# Altium PCB POWER_SUPPLY.PcbDoc (part 4 of 5)
Units mm, origin at the board's own origin, x right, y up, seen from the top; angles counter-clockwise.
Board outline 115 x 115 mm, 2 copper layers (Top Layer, Bottom Layer), stack 1.58 mm thick; 91 components, 48 nets, 207 pads, 26 vias.
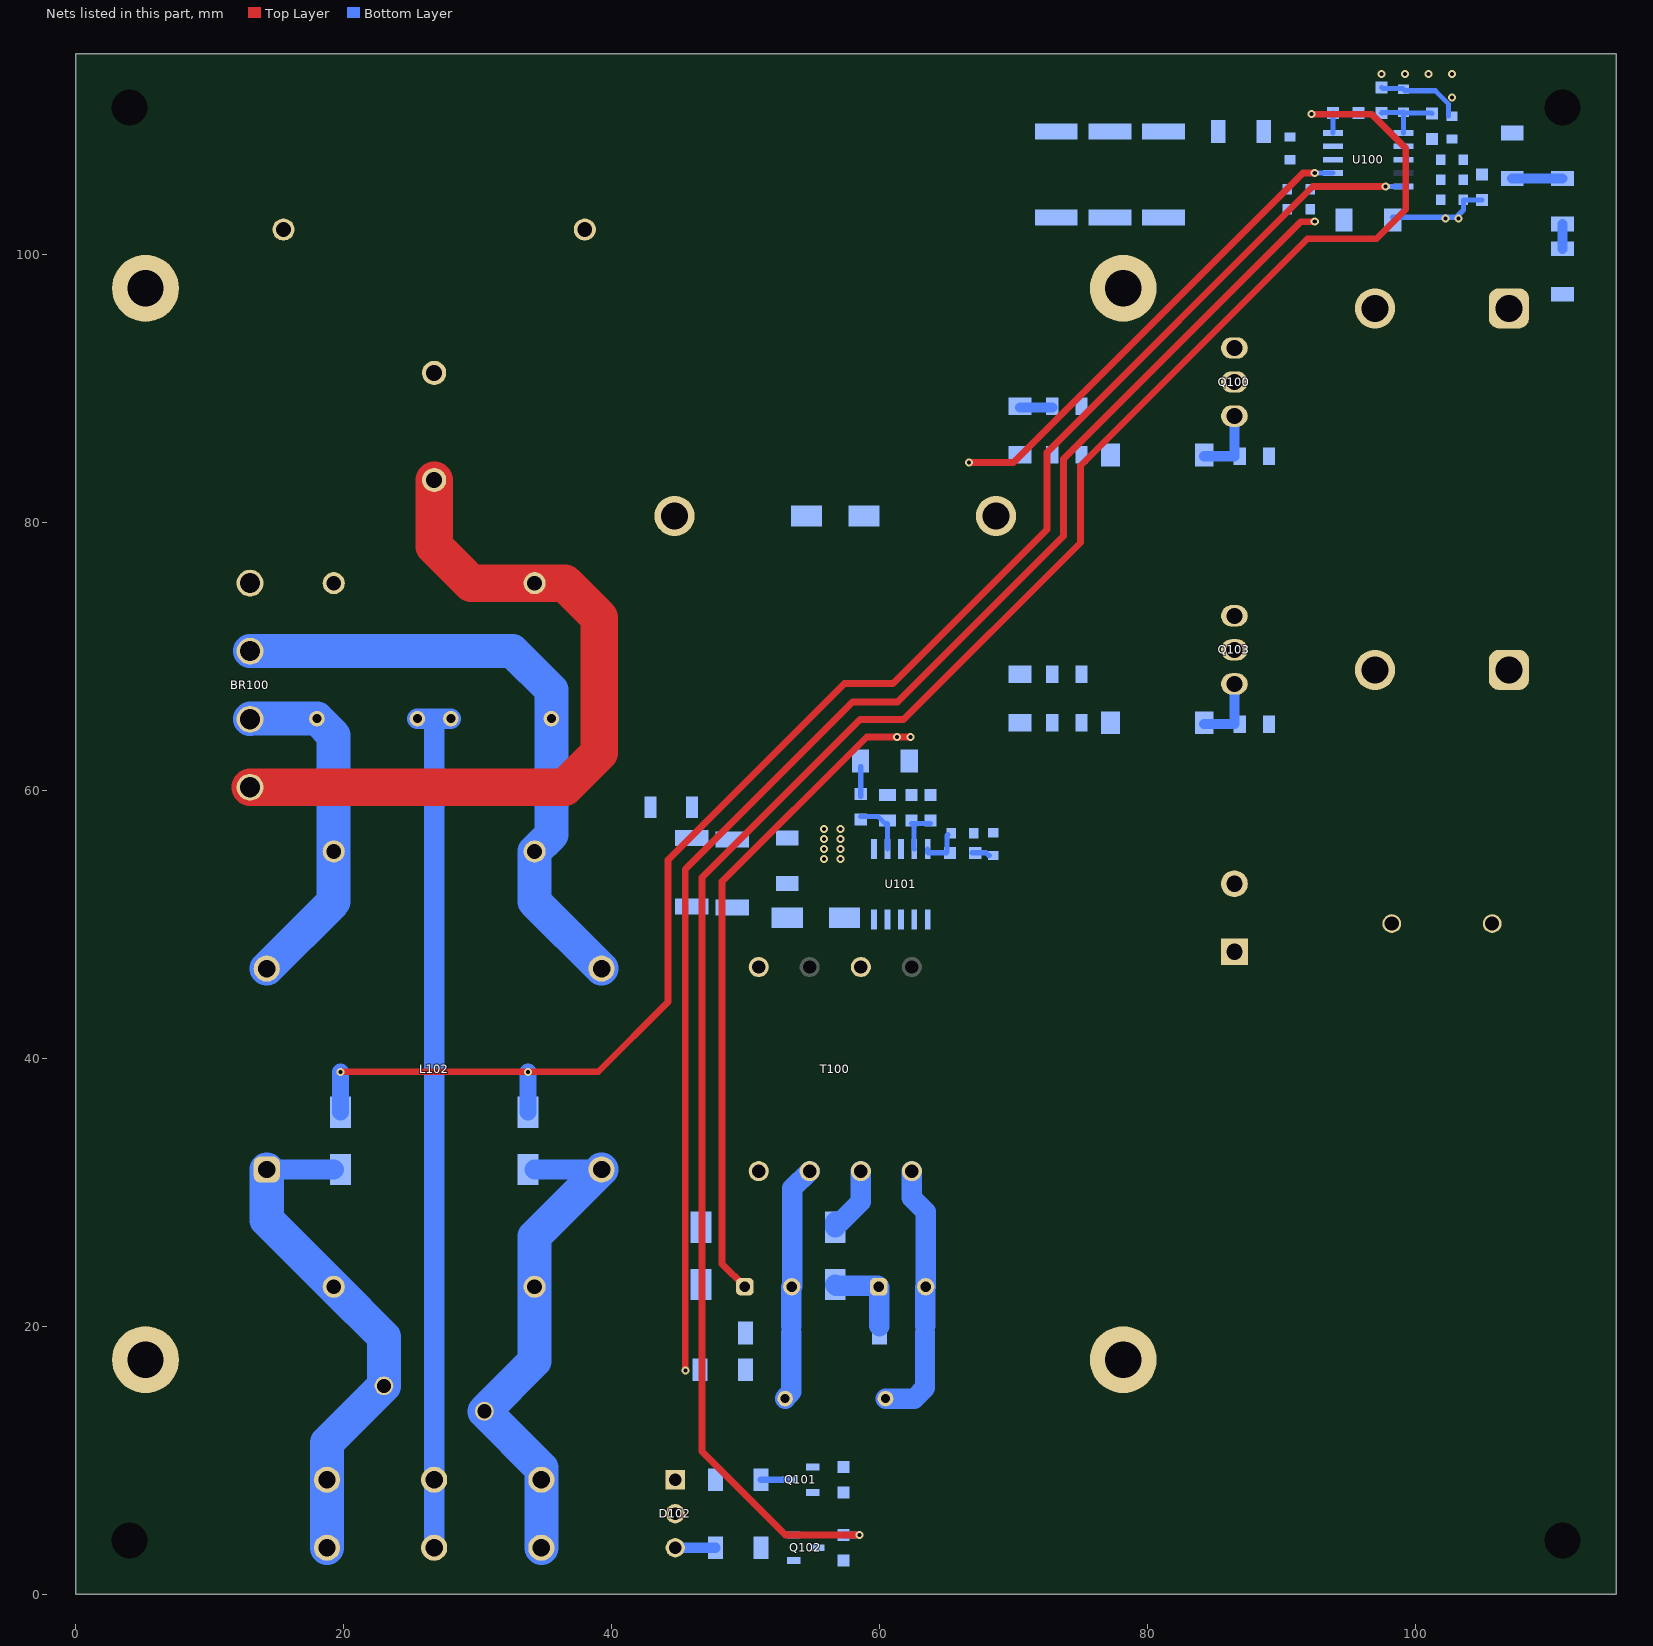
[diagram p2: the nets of this part, all layers, seen from the top]

## Part data (continued)
R121 R122: library part RC2010FK-07150KL, "RES 150K OHM 1% 3/4W 2010", Case Code (Imperial)=2010, Case Code (Metric)=5025, Manufacturer="Yageo Group", Max Operating Temperature=155°C, Max Power Dissipation=750mW, Min Operating Temperature=-55°C, Supplier Part Number=13-RC2010FK-07150KLDKR-ND, Temperature Coefficient=100ppm/°C, Tolerance=1%, Voltage Rating=400V, Working Voltage=200V, Case/Package=2010, Category="Chip SMD Resistors", China RoHS=Non-Compliant, ComponentLink1Description=https://datasheet.octopart.com:443/RC2010FK-07150KL-Yageo-datasheet-175887523.pdf?src-supplier=Newark, ComponentLink1URL=https://datasheet.octopart.com:443/RC2010FK-07150KL-Yageo-datasheet-175887523.pdf?src-supplier=Newark, ComponentLink2Description=https://datasheet.octopart.com:443/RC2010FK-07150KL-Yageo-datasheet-103092701.pdf?src-supplier=Upverter, ComponentLink2URL=https://datasheet.octopart.com:443/RC2010FK-07150KL-Yageo-datasheet-103092701.pdf?src-supplier=Upverter, ComponentLink3Description=https://datasheet.octopart.com:443/RC2010FK-07150KL-Yageo-datasheet-176638170.pdf?src-supplier=Future+Electronics, ComponentLink3URL=https://datasheet.octopart.com:443/RC2010FK-07150KL-Yageo-datasheet-176638170.pdf?src-supplier=Future+Electronics, ComponentLink4Description=https://datasheet.octopart.com:443/RC2010FK-07150KL-Yageo-datasheet-164759695.pdf?src-supplier=Future+Electronics, ComponentLink4URL=https://datasheet.octopart.com:443/RC2010FK-07150KL-Yageo-datasheet-164759695.pdf?src-supplier=Future+Electronics, ComponentLink5Description=https://datasheet.octopart.com:443/RC2010FK-07150KL-Yageo-datasheet-137700087.pdf?src-supplier=Future+Electronics, ComponentLink5URL=https://datasheet.octopart.com:443/RC2010FK-07150KL-Yageo-datasheet-137700087.pdf?src-supplier=Future+Electronics, ComponentLink6Description=https://datasheet.octopart.com/RC2010FK-07150KL-Yageo-datasheet-73766026.pdf, ComponentLink6URL=https://datasheet.octopart.com/RC2010FK-07150KL-Yageo-datasheet-73766026.pdf, ComponentLink7Description=http://sigma.octopart.com:80/conflict_mineral_statement/Yageo-company-3.pdf?src-supplier=Compliance+Statements, ComponentLink7URL=http://sigma.octopart.com:80/conflict_mineral_statement/Yageo-company-3.pdf?src-supplier=Compliance+Statements, ComponentLink8Description=http://sigma.octopart.com:80/rohs_statement/Yageo-company-2.pdf?src-supplier=Compliance+Statements, ComponentLink8URL=http://sigma.octopart.com:80/rohs_statement/Yageo-company-2.pdf?src-supplier=Compliance+Statements, Composition="Thick Film", Country of Origin="Mainland China, Taiwan", Export Control Classification Number (ECCN) Code=EAR99, Features="Moisture Resistant", Harmonized Tariff Schedule (HTS) Code=8533.21.00.30, Height=550µm, Introduction Date=2004-10-04, Length=5mm, Lifecycle Status=Production, Manufacturer Part Number=RC2010FK-07150KL, Mounting Technology="Surface Mount", Number of Terminals=2, Number of Terminations=2, Power Rating=750mW, Pricing="1=0.23, 10=0.117, 25=0.0932, 50=0.0796, 100=0.0689, 250=0.05808, 500=0.05186, 1000=0.04694 (USD)", REACH SVHC=Yes, RoHS=Compliant, Stock=15946, Supplier=DigiKey, Termination=SMD/SMT, Width=2.5mm
R123: library part RC1206FR-07511RL, "RES 511 OHM 1% 1/4W 1206", Case Code (Imperial)=1206, Case Code (Metric)=3216, Manufacturer="Yageo Group", Max Operating Temperature=155°C, Max Power Dissipation=250mW, Min Operating Temperature=-55°C, Supplier Part Number=311-511FRCT-ND, Temperature Coefficient=100ppm/°C, Tolerance=1%, Voltage Rating=200V, Case/Package=1206, Category="Chip SMD Resistors", China RoHS=Non-Compliant, ComponentLink1Description=https://datasheet.octopart.com:443/RC1206FR-07511RL-Yageo-datasheet-175887523.pdf?src-supplier=Newark, ComponentLink1URL=https://datasheet.octopart.com:443/RC1206FR-07511RL-Yageo-datasheet-175887523.pdf?src-supplier=Newark, ComponentLink2Description=https://datasheet.octopart.com:443/RC1206FR-07511RL-Yageo-datasheet-103092701.pdf?src-supplier=Upverter, ComponentLink2URL=https://datasheet.octopart.com:443/RC1206FR-07511RL-Yageo-datasheet-103092701.pdf?src-supplier=Upverter, ComponentLink3Description=https://datasheet.octopart.com:443/RC1206FR-07511RL-Yageo-Group-datasheet-190305687.pdf?src-supplier=Future+Electronics, ComponentLink3URL=https://datasheet.octopart.com:443/RC1206FR-07511RL-Yageo-Group-datasheet-190305687.pdf?src-supplier=Future+Electronics, ComponentLink4Description=https://datasheet.octopart.com:443/RC1206FR-07511RL-Yageo-datasheet-164759695.pdf?src-supplier=Future+Electronics, ComponentLink4URL=https://datasheet.octopart.com:443/RC1206FR-07511RL-Yageo-datasheet-164759695.pdf?src-supplier=Future+Electronics, ComponentLink5Description=https://datasheet.octopart.com:443/RC1206FR-07511RL-Yageo-datasheet-127823281.pdf?src-supplier=Future+Electronics, ComponentLink5URL=https://datasheet.octopart.com:443/RC1206FR-07511RL-Yageo-datasheet-127823281.pdf?src-supplier=Future+Electronics, ComponentLink6Description=https://datasheet.octopart.com:443/RC1206FR-07511RL-Yageo-datasheet-137700087.pdf?src-supplier=Future+Electronics, ComponentLink6URL=https://datasheet.octopart.com:443/RC1206FR-07511RL-Yageo-datasheet-137700087.pdf?src-supplier=Future+Electronics, ComponentLink7Description=https://datasheet.octopart.com:443/RC1206FR-07511RL-Yageo-datasheet-27233761.pdf?src-supplier=Future+Electronics, ComponentLink7URL=https://datasheet.octopart.com:443/RC1206FR-07511RL-Yageo-datasheet-27233761.pdf?src-supplier=Future+Electronics, ComponentLink8Description=https://datasheet.octopart.com:443/RC1206FR-07511RL-Yageo-datasheet-13032847.pdf?src-supplier=Future+Electronics, ComponentLink8URL=https://datasheet.octopart.com:443/RC1206FR-07511RL-Yageo-datasheet-13032847.pdf?src-supplier=Future+Electronics, ComponentLink9Description=https://datasheet.octopart.com:443/RC1206FR-07511RL-Yageo-datasheet-8359522.pdf?src-supplier=Future+Electronics, ComponentLink9URL=https://datasheet.octopart.com:443/RC1206FR-07511RL-Yageo-datasheet-8359522.pdf?src-supplier=Future+Electronics, ComponentLink10Description=https://datasheet.octopart.com:443/RC1206FR-07511RL-Yageo-Group-datasheet-189192902.pdf?src-supplier=TME, ComponentLink10URL=https://datasheet.octopart.com:443/RC1206FR-07511RL-Yageo-Group-datasheet-189192902.pdf?src-supplier=TME, ComponentLink11Description=https://datasheet.octopart.com:443/RC1206FR-07511RL-Yageo-Group-datasheet-176638170.pdf?src-supplier=TME, ComponentLink11URL=https://datasheet.octopart.com:443/RC1206FR-07511RL-Yageo-Group-datasheet-176638170.pdf?src-supplier=TME, ComponentLink12Description=https://datasheet.octopart.com/RC1206FR-07511RL-Yageo-datasheet-73766026.pdf, ComponentLink12URL=https://datasheet.octopart.com/RC1206FR-07511RL-Yageo-datasheet-73766026.pdf, ComponentLink13Description=https://datasheet.octopart.com:443/RC1206FR-07511RL-Yageo-datasheet-118639.pdf?src-supplier=DigiKey, ComponentLink13URL=https://datasheet.octopart.com:443/RC1206FR-07511RL-Yageo-datasheet-118639.pdf?src-supplier=DigiKey, ComponentLink14Description=http://sigma.octopart.com:80/conflict_mineral_statement/Yageo-company-3.pdf?src-supplier=Compliance+Statements, ComponentLink14URL=http://sigma.octopart.com:80/conflict_mineral_statement/Yageo-company-3.pdf?src-supplier=Compliance+Statements, ComponentLink15Description=http://sigma.octopart.com:80/rohs_statement/Yageo-company-2.pdf?src-supplier=Compliance+Statements, ComponentLink15URL=http://sigma.octopart.com:80/rohs_statement/Yageo-company-2.pdf?src-supplier=Compliance+Statements, Composition="Thick Film", Country of Origin="Mainland China, Taiwan", Depth=1.6mm, Export Control Classification Number (ECCN) Code=EAR99, Features="Moisture Resistant", Harmonized Tariff Schedule (HTS) Code=8533.21.00.30, Height=550µm, Introduction Date=2004-09-22, Lead Free="Lead Free", Length=3.1mm, Lifecycle Status=Production, Manufacturer Part Number=RC1206FR-07511RL, Military Standard=Not, Mounting Technology="Surface Mount", Number of Terminals=2, Number of Terminations=2, Packaging="Tape & Reel", Power Rating=250mW, Pricing="1=0.1, 10=0.047, 25=0.036, 50=0.0296, 100=0.0247, 250=0.0198, 500=0.01698, 1000=0.01477 (USD)", REACH SVHC=Yes, RoHS=Compliant, Schedule B="8533210045, 8533210045|8533210045|8533210045|8533210045|8533210045", Stock=3972, Supplier=DigiKey, Termination=SMD/SMT, Voltage Rating (DC)=200V, Width=1.6mm, Working Voltage=200V
R124: library part RC1206FR-0747RL, "RES 47R OHM 1% 1/4W 1206", Case Code (Imperial)=1206, Case Code (Metric)=3216, Manufacturer="Yageo Group", Max Operating Temperature=155°C, Min Operating Temperature=-55°C, Power Rating=250mW, Supplier Part Number=311-47.0FRDKR-ND, Temperature Coefficient=100ppm/°C, Tolerance=1%, Voltage Rating=200V, Case/Package=1206, Category="Chip SMD Resistors", China RoHS=Non-Compliant, ComponentLink1Description=https://datasheet.octopart.com:443/RC1206FR-0747RL-Yageo-datasheet-175887523.pdf?src-supplier=IHS, ComponentLink1URL=https://datasheet.octopart.com:443/RC1206FR-0747RL-Yageo-datasheet-175887523.pdf?src-supplier=IHS, ComponentLink2Description=https://datasheet.octopart.com:443/RC1206FR-0747RL-Yageo-datasheet-103092701.pdf?src-supplier=Upverter, ComponentLink2URL=https://datasheet.octopart.com:443/RC1206FR-0747RL-Yageo-datasheet-103092701.pdf?src-supplier=Upverter, ComponentLink3Description=https://datasheet.octopart.com:443/RC1206FR-0747RL-Yageo-datasheet-8359522.pdf?src-supplier=element14+APAC, ComponentLink3URL=https://datasheet.octopart.com:443/RC1206FR-0747RL-Yageo-datasheet-8359522.pdf?src-supplier=element14+APAC, ComponentLink4Description=https://datasheet.octopart.com:443/RC1206FR-0747RL-Yageo-Group-datasheet-190305687.pdf?src-supplier=Future+Electronics, ComponentLink4URL=https://datasheet.octopart.com:443/RC1206FR-0747RL-Yageo-Group-datasheet-190305687.pdf?src-supplier=Future+Electronics, ComponentLink5Description=https://datasheet.octopart.com:443/RC1206FR-0747RL-Yageo-datasheet-164759695.pdf?src-supplier=Future+Electronics, ComponentLink5URL=https://datasheet.octopart.com:443/RC1206FR-0747RL-Yageo-datasheet-164759695.pdf?src-supplier=Future+Electronics, ComponentLink6Description=https://datasheet.octopart.com:443/RC1206FR-0747RL-Yageo-datasheet-137700087.pdf?src-supplier=Future+Electronics, ComponentLink6URL=https://datasheet.octopart.com:443/RC1206FR-0747RL-Yageo-datasheet-137700087.pdf?src-supplier=Future+Electronics, ComponentLink7Description=https://datasheet.octopart.com:443/RC1206FR-0747RL-Yageo-datasheet-27233761.pdf?src-supplier=Future+Electronics, ComponentLink7URL=https://datasheet.octopart.com:443/RC1206FR-0747RL-Yageo-datasheet-27233761.pdf?src-supplier=Future+Electronics, ComponentLink8Description=https://datasheet.octopart.com:443/RC1206FR-0747RL-Yageo-datasheet-13032847.pdf?src-supplier=Future+Electronics, ComponentLink8URL=https://datasheet.octopart.com:443/RC1206FR-0747RL-Yageo-datasheet-13032847.pdf?src-supplier=Future+Electronics, ComponentLink9Description=https://datasheet.octopart.com:443/RC1206FR-0747RL-Yageo-datasheet-62067350.pdf?src-supplier=Farnell, ComponentLink9URL=https://datasheet.octopart.com:443/RC1206FR-0747RL-Yageo-datasheet-62067350.pdf?src-supplier=Farnell, ComponentLink10Description=https://datasheet.octopart.com:443/RC1206FR-0747RL-Yageo-datasheet-13691069.pdf?src-supplier=Farnell, ComponentLink10URL=https://datasheet.octopart.com:443/RC1206FR-0747RL-Yageo-datasheet-13691069.pdf?src-supplier=Farnell, ComponentLink11Description=https://datasheet.octopart.com:443/RC1206FR-0747RL-Yageo-datasheet-148775077.pdf?src-supplier=JRH+Electronics, ComponentLink11URL=https://datasheet.octopart.com:443/RC1206FR-0747RL-Yageo-datasheet-148775077.pdf?src-supplier=JRH+Electronics, ComponentLink12Description=https://datasheet.octopart.com/RC1206FR-0747RL-Yageo-datasheet-73766026.pdf, ComponentLink12URL=https://datasheet.octopart.com/RC1206FR-0747RL-Yageo-datasheet-73766026.pdf, ComponentLink13Description=https://datasheet.octopart.com:443/RC1206FR-0747RL-Yageo-datasheet-118639.pdf?src-supplier=DigiKey, ComponentLink13URL=https://datasheet.octopart.com:443/RC1206FR-0747RL-Yageo-datasheet-118639.pdf?src-supplier=DigiKey, ComponentLink14Description=http://sigma.octopart.com:80/conflict_mineral_statement/Yageo-company-3.pdf?src-supplier=Compliance+Statements, ComponentLink14URL=http://sigma.octopart.com:80/conflict_mineral_statement/Yageo-company-3.pdf?src-supplier=Compliance+Statements, ComponentLink15Description=http://sigma.octopart.com:80/rohs_statement/Yageo-company-2.pdf?src-supplier=Compliance+Statements, ComponentLink15URL=http://sigma.octopart.com:80/rohs_statement/Yageo-company-2.pdf?src-supplier=Compliance+Statements, Composition="Thick Film", Country of Origin="Mainland China, Taiwan", Depth=1.6mm, Export Control Classification Number (ECCN) Code=EAR99, Harmonized Tariff Schedule (HTS) Code=8533.21.00.30, Height=550µm, Introduction Date=2004-09-22, Lead Free="Lead Free", Length=3.1mm, Lifecycle Status=Production, Manufacturer Part Number=RC1206FR-0747RL, Military Standard=Not, Mounting Technology="Surface Mount", Number of Terminals=2, Number of Terminations=2, Packaging="Tape & Reel", Pins=2, Pricing="1=0.1, 10=0.047, 25=0.036, 50=0.0296, 100=0.0247, 250=0.0198, 500=0.01698, 1000=0.01477 (USD)", REACH SVHC=Yes, RoHS=Compliant, Schedule B="8533210045, 8533210045|8533210045, 8533210045|8533210045|8533210045, 8533210045|8533210045|8533210045|8533210045", Stock=63732, Supplier=DigiKey, Termination=SMD/SMT, Voltage Rating (AC)=200V, Voltage Rating (DC)=200V, Weight=16.187578mg, Width=1.6mm, Working Voltage=200V
R125: library part RC1206FR-070RL, "RES 0 OHM JUMPER 1/4W 1206", Case Code (Imperial)=1206, Case Code (Metric)=3216, Manufacturer="Yageo Group", Max Operating Temperature=155°C, Max Power Dissipation=250mW, Min Operating Temperature=-55°C, Supplier Part Number=YAG3367CT-ND, Tolerance=1%, Voltage Rating=200V, Case/Package=1206, Category="Chip SMD Resistors", China RoHS=Non-Compliant, ComponentLink1Description=https://datasheet.octopart.com:443/RC1206FR-070RL-Yageo-datasheet-141265859.pdf?src-supplier=Upverter, ComponentLink1URL=https://datasheet.octopart.com:443/RC1206FR-070RL-Yageo-datasheet-141265859.pdf?src-supplier=Upverter, ComponentLink2Description=https://datasheet.octopart.com:443/RC1206FR-070RL-Yageo-datasheet-8359522.pdf?src-supplier=IHS, ComponentLink2URL=https://datasheet.octopart.com:443/RC1206FR-070RL-Yageo-datasheet-8359522.pdf?src-supplier=IHS, ComponentLink3Description=https://datasheet.octopart.com:443/RC1206FR-070RL-Yageo-Group-datasheet-176638170.pdf?src-supplier=Future+Electronics, ComponentLink3URL=https://datasheet.octopart.com:443/RC1206FR-070RL-Yageo-Group-datasheet-176638170.pdf?src-supplier=Future+Electronics, ComponentLink4Description=https://datasheet.octopart.com:443/RC1206FR-070RL-Yageo-datasheet-164759695.pdf?src-supplier=Future+Electronics, ComponentLink4URL=https://datasheet.octopart.com:443/RC1206FR-070RL-Yageo-datasheet-164759695.pdf?src-supplier=Future+Electronics, ComponentLink5Description=https://datasheet.octopart.com:443/RC1206FR-070RL-Yageo-datasheet-137700087.pdf?src-supplier=Future+Electronics, ComponentLink5URL=https://datasheet.octopart.com:443/RC1206FR-070RL-Yageo-datasheet-137700087.pdf?src-supplier=Future+Electronics, ComponentLink6Description=https://datasheet.octopart.com:443/RC1206FR-070RL-Yageo-datasheet-27233761.pdf?src-supplier=Future+Electronics, ComponentLink6URL=https://datasheet.octopart.com:443/RC1206FR-070RL-Yageo-datasheet-27233761.pdf?src-supplier=Future+Electronics, ComponentLink7Description=https://datasheet.octopart.com:443/RC1206FR-070RL-Yageo-datasheet-13032847.pdf?src-supplier=Future+Electronics, ComponentLink7URL=https://datasheet.octopart.com:443/RC1206FR-070RL-Yageo-datasheet-13032847.pdf?src-supplier=Future+Electronics, ComponentLink8Description=https://datasheet.octopart.com/RC1206FR-070RL-Yageo-datasheet-73766026.pdf, ComponentLink8URL=https://datasheet.octopart.com/RC1206FR-070RL-Yageo-datasheet-73766026.pdf, ComponentLink9Description=http://sigma.octopart.com:80/conflict_mineral_statement/Yageo-company-3.pdf?src-supplier=Compliance+Statements, ComponentLink9URL=http://sigma.octopart.com:80/conflict_mineral_statement/Yageo-company-3.pdf?src-supplier=Compliance+Statements, ComponentLink10Description=http://sigma.octopart.com:80/rohs_statement/Yageo-company-2.pdf?src-supplier=Compliance+Statements, ComponentLink10URL=http://sigma.octopart.com:80/rohs_statement/Yageo-company-2.pdf?src-supplier=Compliance+Statements, Composition="Thick Film", Contact Plating=Tin, Country of Origin="Mainland China, Taiwan", Export Control Classification Number (ECCN) Code=EAR99, Features="Moisture Resistant", Harmonized Tariff Schedule (HTS) Code=8533.21.00.30, Height=550µm, Introduction Date=2009-07-17, Lead Free="Lead Free", Length=3.1mm, Lifecycle Status=Production, Manufacturer Part Number=RC1206FR-070RL, Mounting Technology="Surface Mount", Number of Terminals=2, Number of Terminations=2, Packaging="Tape & Reel", Power Rating=250mW, Pricing="1=0.1, 10=0.028, 25=0.0232, 50=0.0204, 100=0.0178, 250=0.01508, 500=0.01334, 1000=0.01187 (USD)", Radiation Hardening=No, REACH SVHC=Yes, RoHS=Compliant, Stock=769584, Supplier=DigiKey, Width=1.6mm
R126: library part RC1206FR-071K5L, "RES 1.5K OHM 1% 1/4W 1206", Case Code (Imperial)=1206, Case Code (Metric)=3216, Manufacturer="Yageo Group", Max Operating Temperature=155°C, Max Power Dissipation=250mW, Min Operating Temperature=-55°C, Supplier Part Number=311-1.50KFRCT-ND, Temperature Coefficient=100ppm/°C, Tolerance=1%, Voltage Rating=200V, Case/Package=1206, Category="Chip SMD Resistors", China RoHS=Non-Compliant, ComponentLink1Description=https://datasheet.octopart.com:443/RC1206FR-071K5L-Yageo-datasheet-175887523.pdf?src-supplier=Newark, ComponentLink1URL=https://datasheet.octopart.com:443/RC1206FR-071K5L-Yageo-datasheet-175887523.pdf?src-supplier=Newark, ComponentLink2Description=https://datasheet.octopart.com:443/RC1206FR-071K5L-Yageo-datasheet-103092701.pdf?src-supplier=Upverter, ComponentLink2URL=https://datasheet.octopart.com:443/RC1206FR-071K5L-Yageo-datasheet-103092701.pdf?src-supplier=Upverter, ComponentLink3Description=https://datasheet.octopart.com:443/RC1206FR-071K5L-Yageo-datasheet-8359522.pdf?src-supplier=element14+APAC, ComponentLink3URL=https://datasheet.octopart.com:443/RC1206FR-071K5L-Yageo-datasheet-8359522.pdf?src-supplier=element14+APAC, ComponentLink4Description=https://datasheet.octopart.com:443/RC1206FR-071K5L-Yageo-Group-datasheet-190305687.pdf?src-supplier=Future+Electronics, ComponentLink4URL=https://datasheet.octopart.com:443/RC1206FR-071K5L-Yageo-Group-datasheet-190305687.pdf?src-supplier=Future+Electronics, ComponentLink5Description=https://datasheet.octopart.com:443/RC1206FR-071K5L-Yageo-datasheet-164759695.pdf?src-supplier=Future+Electronics, ComponentLink5URL=https://datasheet.octopart.com:443/RC1206FR-071K5L-Yageo-datasheet-164759695.pdf?src-supplier=Future+Electronics, ComponentLink6Description=https://datasheet.octopart.com:443/RC1206FR-071K5L-Yageo-datasheet-137700087.pdf?src-supplier=Future+Electronics, ComponentLink6URL=https://datasheet.octopart.com:443/RC1206FR-071K5L-Yageo-datasheet-137700087.pdf?src-supplier=Future+Electronics, ComponentLink7Description=https://datasheet.octopart.com:443/RC1206FR-071K5L-Yageo-datasheet-27233761.pdf?src-supplier=Future+Electronics, ComponentLink7URL=https://datasheet.octopart.com:443/RC1206FR-071K5L-Yageo-datasheet-27233761.pdf?src-supplier=Future+Electronics, ComponentLink8Description=https://datasheet.octopart.com:443/RC1206FR-071K5L-Yageo-datasheet-13032847.pdf?src-supplier=Future+Electronics, ComponentLink8URL=https://datasheet.octopart.com:443/RC1206FR-071K5L-Yageo-datasheet-13032847.pdf?src-supplier=Future+Electronics, ComponentLink9Description=https://datasheet.octopart.com:443/RC1206FR-071K5L-Yageo-datasheet-8324387.pdf?src-supplier=Future+Electronics, ComponentLink9URL=https://datasheet.octopart.com:443/RC1206FR-071K5L-Yageo-datasheet-8324387.pdf?src-supplier=Future+Electronics, ComponentLink10Description=https://datasheet.octopart.com:443/RC1206FR-071K5L-Yageo-datasheet-62067350.pdf?src-supplier=Farnell, ComponentLink10URL=https://datasheet.octopart.com:443/RC1206FR-071K5L-Yageo-datasheet-62067350.pdf?src-supplier=Farnell, ComponentLink11Description=https://datasheet.octopart.com:443/RC1206FR-071K5L-Yageo-datasheet-176638170.pdf?src-supplier=Farnell, ComponentLink11URL=https://datasheet.octopart.com:443/RC1206FR-071K5L-Yageo-datasheet-176638170.pdf?src-supplier=Farnell, ComponentLink12Description=https://datasheet.octopart.com:443/RC1206FR-071K5L-Yageo-datasheet-79472498.pdf?src-supplier=Megastar, ComponentLink12URL=https://datasheet.octopart.com:443/RC1206FR-071K5L-Yageo-datasheet-79472498.pdf?src-supplier=Megastar, ComponentLink13Description=https://datasheet.octopart.com/RC1206FR-071K5L-Yageo-datasheet-73766026.pdf, ComponentLink13URL=https://datasheet.octopart.com/RC1206FR-071K5L-Yageo-datasheet-73766026.pdf, ComponentLink14Description=https://datasheet.octopart.com:443/RC1206FR-071K5L-Yageo-datasheet-118639.pdf?src-supplier=DigiKey, ComponentLink14URL=https://datasheet.octopart.com:443/RC1206FR-071K5L-Yageo-datasheet-118639.pdf?src-supplier=DigiKey, ComponentLink15Description=http://sigma.octopart.com:80/conflict_mineral_statement/Yageo-company-3.pdf?src-supplier=Compliance+Statements, ComponentLink15URL=http://sigma.octopart.com:80/conflict_mineral_statement/Yageo-company-3.pdf?src-supplier=Compliance+Statements, ComponentLink16Description=http://sigma.octopart.com:80/rohs_statement/Yageo-company-2.pdf?src-supplier=Compliance+Statements, ComponentLink16URL=http://sigma.octopart.com:80/rohs_statement/Yageo-company-2.pdf?src-supplier=Compliance+Statements, Composition="Thick Film", Depth=1.6mm, Features="Moisture Resistant", Height=550µm, Lead Free="Lead Free", Length=3.1mm, Lifecycle Status=Production, Manufacturer Part Number=RC1206FR-071K5L, Military Standard=Not, Mounting Technology="Surface Mount", Number of Terminals=2, Number of Terminations=2, Packaging="Tape & Reel", Pins=2, Power Rating=250mW, Pricing="1=0.1, 10=0.047, 25=0.036, 50=0.0296, 100=0.0247, 250=0.0198, 500=0.01698, 1000=0.01477 (USD)", REACH SVHC=Yes, RoHS=Compliant, Schedule B="8533210045, 8533210045|8533210045, 8533210045|8533210045|8533210045, 8533210045|8533210045|8533210045|8533210045", Stock=90251, Supplier=DigiKey, Termination=SMD/SMT, Voltage Rating (AC)=200V, Voltage Rating (DC)=200V, Width=1.6mm, Working Voltage=200V
R127: library part RC0603FR-0710RL, "RES 10 OHM 1% 1/10W 0603", Case Code (Imperial)=0603, Case Code (Metric)=1608, Manufacturer="Yageo Group", Max Operating Temperature=155°C, Max Power Dissipation=100mW, Min Operating Temperature=-55°C, Supplier Part Number=311-10.0HRCT-ND, Temperature Coefficient=±200ppm/°C, Tolerance=1%, Voltage Rating=75V, Voltage Rating (AC)=50V, Case/Package=0603, Category="Chip SMD Resistors", China RoHS=Non-Compliant, Component Link Description=https://www.yageogroup.com/content/datasheet/asset/file/PYU-RC_GROUP_51_ROHS_L, Component Link URL=https://www.yageogroup.com/content/datasheet/asset/file/PYU-RC_GROUP_51_ROHS_L, Composition="Thick Film", Contact Plating=Tin, Datasheet=https://www.yageogroup.com/content/datasheet/asset/file/PYU-RC_GROUP_51_ROHS_L, Depth=800µm, Features="Moisture Resistant", Height=450µm, Lead Free="Lead Free", Length=1.6mm, Lifecycle Status=Production, Manufacturer Part Number=RC0603FR-0710RL, Military Standard=Not, Mounting Technology="Surface Mount", Number of Terminals=2, Number of Terminations=2, Packaging="Tape & Reel", Power Dissipation=100mW, Power Rating=100mW, Radiation Hardening=No, REACH SVHC=Yes, RoHS=Compliant, Supplier=DigiKey, Termination=SMD/SMT, Voltage Rating (DC)=50V, Weight=2.012816mg, Width=800µm, Working Voltage=75V
R128: library part RC0603FR-07301KL, "RES 301K OHM 1% 1/10W 0603", Case Code (Imperial)=0603, Case Code (Metric)=1608, Manufacturer="Yageo Group", Max Operating Temperature=155°C, Max Power Dissipation=100mW, Min Operating Temperature=-55°C, Supplier Part Number=311-301KHRCT-ND, Temperature Coefficient=±200ppm/°C, Tolerance=1%, Voltage Rating=75V, Voltage Rating (AC)=50V, Case/Package=0603, Category="Chip SMD Resistors", China RoHS=Non-Compliant, Component Link Description=https://www.yageogroup.com/content/datasheet/asset/file/PYU-RC_GROUP_51_ROHS_L, Component Link URL=https://www.yageogroup.com/content/datasheet/asset/file/PYU-RC_GROUP_51_ROHS_L, Composition="Thick Film", Contact Plating=Tin, Datasheet=https://www.yageogroup.com/content/datasheet/asset/file/PYU-RC_GROUP_51_ROHS_L, Depth=800µm, Features="Moisture Resistant", Height=450µm, Lead Free="Lead Free", Length=1.6mm, Lifecycle Status=Production, Manufacturer Part Number=RC0603FR-07301KL, Military Standard=Not, Mounting Technology="Surface Mount", Number of Terminals=2, Number of Terminations=2, Packaging="Tape & Reel", Power Dissipation=100mW, Power Rating=100mW, Radiation Hardening=No, REACH SVHC=Yes, RoHS=Compliant, Supplier=DigiKey, Termination=SMD/SMT, Voltage Rating (DC)=50V, Weight=2.012816mg, Width=800µm, Working Voltage=75V
RT100: library part B57237S0109M054, "NTC THERMISTOR ICL S237/1/M54", Manufacturer=EPCOS, Max Operating Temperature=170°C, Min Operating Temperature=-55°C, Power Dissipation=3.1W, Ratings=VDE, Supplier Part Number=495-B57237S0109M054CT-ND, Tolerance=20%, Category=Resistors, ComponentLink1Description=https://datasheet.octopart.com:443/B57237S0109M054-EPCOS-datasheet-155389212.pdf?src-supplier=IHS, ComponentLink1URL=https://datasheet.octopart.com:443/B57237S0109M054-EPCOS-datasheet-155389212.pdf?src-supplier=IHS, Export Control Classification Number (ECCN) Code=EAR99, Harmonized Tariff Schedule (HTS) Code=8533.40.80.70, Height=22mm, Introduction Date=2019-05-03, Length=15mm, Lifecycle Status=Production, Manufacturer Part Number=B57237S0109M054, Number of Terminals=2, Pricing="1=1.46, 5=1.29, 10=1.227, 25=1.152, 50=1.101, 100=1.0542 (USD)", REACH SVHC=No, RoHS=Compliant, Stock=1723, Supplier=DigiKey, Width=7mm
RV100: library part B72214S0301K101, "Var MOV 300VAC/385VDC 4500A 470V Thru-Hole Radial Automotive Bulk", Case/Package=Radial, Clamping Current=50A, Clamping Voltage=775V, Manufacturer=EPCOS, Max Operating Temperature=105°C, Max Surge Current=4.5kA, Max Voltage Rating (AC)=300V, Max Voltage Rating (DC)=385V, Min Operating Temperature=-40°C, Power Dissipation=600mW, Supplier Part Number=495-3789-ND, Tolerance=10%, Varistor Voltage=470V, Category=Resistors, China RoHS=Compliant, ComponentLink1Description=https://datasheet.octopart.com:443/B72214S0301K101-EPCOS-datasheet-136998859.pdf?src-supplier=Burklin+Elektronik, ComponentLink1URL=https://datasheet.octopart.com:443/B72214S0301K101-EPCOS-datasheet-136998859.pdf?src-supplier=Burklin+Elektronik, ComponentLink2Description=https://datasheet.octopart.com:443/B72214S0301K101-EPCOS-datasheet-109678825.pdf?src-supplier=Ciiva, ComponentLink2URL=https://datasheet.octopart.com:443/B72214S0301K101-EPCOS-datasheet-109678825.pdf?src-supplier=Ciiva, ComponentLink3Description=https://datasheet.octopart.com:443/B72214S0301K101-EPCOS-datasheet-62114839.pdf?src-supplier=Newark, ComponentLink3URL=https://datasheet.octopart.com:443/B72214S0301K101-EPCOS-datasheet-62114839.pdf?src-supplier=Newark, ComponentLink4Description=https://datasheet.octopart.com:443/B72214S0301K101-EPCOS-datasheet-38159044.pdf?src-supplier=Newark, ComponentLink4URL=https://datasheet.octopart.com:443/B72214S0301K101-EPCOS-datasheet-38159044.pdf?src-supplier=Newark, ComponentLink5Description=https://datasheet.octopart.com:443/B72214S0301K101-EPCOS-datasheet-11776948.pdf?src-supplier=element14+APAC, ComponentLink5URL=https://datasheet.octopart.com:443/B72214S0301K101-EPCOS-datasheet-11776948.pdf?src-supplier=element14+APAC, ComponentLink6Description=https://datasheet.octopart.com:443/B72214S0301K101-EPCOS-datasheet-567204.pdf?src-supplier=Farnell, ComponentLink6URL=https://datasheet.octopart.com:443/B72214S0301K101-EPCOS-datasheet-567204.pdf?src-supplier=Farnell, ComponentLink7Description=https://datasheet.octopart.com:443/B72214S0301K101-EPCOS-datasheet-1837.pdf?src-supplier=Farnell, ComponentLink7URL=https://datasheet.octopart.com:443/B72214S0301K101-EPCOS-datasheet-1837.pdf?src-supplier=Farnell, ComponentLink8Description=https://datasheet.octopart.com:443/B72214S0301K101-EPCOS-datasheet-99940739.pdf?src-supplier=TME, ComponentLink8URL=https://datasheet.octopart.com:443/B72214S0301K101-EPCOS-datasheet-99940739.pdf?src-supplier=TME, ComponentLink9Description=https://datasheet.octopart.com:443/B72214S0301K101-EPCOS-datasheet-17565824.pdf?src-supplier=TME, ComponentLink9URL=https://datasheet.octopart.com:443/B72214S0301K101-EPCOS-datasheet-17565824.pdf?src-supplier=TME, Contact Plating=Tin, Depth=5.2mm, Diameter=14mm, Energy=76J, Height=18.5mm, Lead Length=30mm, Lead Pitch=7.5mm, Lead/Base Style=Radial, Lifecycle Status=Production, Manufacturer Part Number=B72214S0301K101, Mounting Technology="Radial, Through Hole", Number of Terminals=2, Packaging=Bulk, Pricing="1=0.37, 10=0.258, 25=0.23, 100=0.1988, 250=0.18396, 500=0.17498, 1000=0.1676, 2500=0.15981, 5000=0.15511 (USD)", REACH SVHC=Yes, RoHS=Compliant, Stock=24616, Supplier=DigiKey, Thickness=5.2mm, Voltage Rating (AC)=300V, Voltage Rating (DC)=385V, Voltage Tolerance=10%, Weight=4.000004g, Width=5.2mm, Working Voltage=385V
T100: library part CUSTOM_FLYBACK_TCC, "TRANSFORMADOR FLYBACK CUSTOMIZADO QUE USEI NO TCC", Manufacturer=Custom, ComponentLink1Description=Datasheet, ComponentLink1URL=https://www.tdk-electronics.tdk.com/inf/80/db/fer/e_16_8_5.pdf, Manufacturer Part Number=Custom
U100: "CCM PFC CONTROLLER WITH HIGH VOL", Case/Package=SOP, Manufacturer=STMicroelectronics, Max Operating Temperature=125°C, Max Supply Current=4.7mA, Max Supply Voltage=24.5V, Max Switching Frequency=71kHz, Min Input Voltage=10V, Min Operating Temperature=-25°C, Nominal Supply Voltage=15V, Supplier Part Number=497-L4986A-ND, Category="Power Factor Correction (PFC) Controllers", China RoHS=Compliant, Country of Origin="Mainland China", Export Control Classification Number (ECCN) Code=EAR99, Harmonized Tariff Schedule (HTS) Code=8542.39.00.60, Height - Seated (Max)=1.75mm, Introduction Date=2021-07-28, Length=4.9mm, Lifecycle Status=Production, Manufacturer Part Number=L4986A, Number of Circuits=1, Number of Terminals=10, Pricing="1=3.49, 10=2.623, 25=2.4068, 100=2.1695, 300=2.0371, 500=1.98814, 1000=1.93198, 2500=1.87271, 5000=1.83699 (USD)", REACH SVHC=Yes, RoHS=Compliant, Stock=138, Supplier=DigiKey, Terminal Pitch=1mm, Topology=Boost, Width=3.9mm
U101: "IC OFFLINE SWITCH FLYBACK 10SSOP", Case/Package=SSOP, Continuous Drain Current (ID)=620mA, Manufacturer=STMicroelectronics, Max Operating Temperature=150°C, Max Supply Current=1.6mA, Max Supply Voltage=30V, Max Switching Frequency=66kHz, Min Breakdown Voltage=730V, Min Input Voltage=4.5V, Min Operating Temperature=-40°C, Nominal Supply Voltage=9V, Supplier Part Number=497-VIPER222LSCT-ND, Category="AC-DC Converters", China RoHS=Compliant, Country of Origin="Mainland China", Export Control Classification Number (ECCN) Code=EAR99, Harmonized Tariff Schedule (HTS) Code=8542.39.00.60, Height - Seated (Max)=1.75mm, Introduction Date=2020-01-22, Length=4.9mm, Lifecycle Status=Production, Manufacturer Part Number=VIPER222LSTR, Number of Circuits=1, Number of Terminals=10, Packaging="Tape and Reel", Pricing="1=0.99, 10=0.709, 25=0.6392, 100=0.5628, 250=0.52628, 500=0.5043, 1000=0.48945 (USD)", Rds On Max=15Ω, REACH SVHC=Yes, RoHS=Compliant, Schedule B="8542390000, 8542390000|8542390000, 8542390000|8542390000|8542390000, 8542390000|8542390000|8542390000|8542390000", Stock=81, Supplier=DigiKey, Terminal Pitch=1mm, Topology=Buck-Boost, Width=3.9mm

## Via types
v1: diameter 0.6, hole 0.3, Top Layer to Bottom Layer, tented both sides, 26 vias

## Nets (pads, with @x,y where several pads share a name; then routed paths per layer and width w, separated by ;. In a path a pad name is that pad's centre, name@x,y a point inside that pad or via, vN(x,y) a via of type N, cw(c..) or ccw(c..) an arc to the next point about the centre after c; other vN are vias at no path point)
+5V_ISO: C116.1 D108.1 R123.2 | length 6.3
  Bottom Layer w1.524: D108.1@56.7,23.11 56.78,23.03 59.87,23.03 C116.1@59.95,22.95 59.975,22.925 59.975,20.025 R123.2@60,20
+15V: C109.2 C110.2 D102.2 D107.1 R114.2 R125.2 U100.1 | length 107.8
  Top Layer w0.508: v1(45.5,16.7) 45.5,54.125 57.975,66.6 61.35,66.6 73.75,79 73.75,84.75 91.47,102.47 v1@92.47,102.47
  other v1: 92.5,102.47
+400V_PFC: C100.1 C101.1 C117.2 R117.1 R121.2 R122.2 RT100.2 T100.4
DRAIN_FLYBACK: D110.2 T100.2 U101.6 U101.7 U101.8 U101.9 U101.10
DRAIN_PFC: D101.2 L101.2 Q100.2 Q103.2
EARTH: C102.1 C107.2 MP101.1 | length 64.4
  Bottom Layer w1.524: C102.1@25.5,65.367 26.75,65.367 ; MP101.1@26.75,3.46 MP101.1@26.75,8.54 26.75,12.084 26.741,12.093 26.741,15.207 26.75,15.216 26.75,65.367 ; C107.2@28,65.367 26.75,65.367
GD_PFC: D105.1 D106.1 R106.1 R112.1 U100.2 | length 36.1
  Top Layer w0.508: v1(66.7,84.5) 70,84.5 91.616,106.116 v1(92.5,106.116)
  Bottom Layer w0.381: v1(92.5,106.116) 92.508,106.108 93.867,106.108 U100.2@93.875,106.1
GND_ISO: C116.2 C119.2 R123.1 T100.8 | length 19.4
  Bottom Layer w1.524: C119.2@60.45,14.6 62.6,14.6 63.4,15.4 R123.1@63.4,19.5 ; T100.8@62.415,31.58 62.415,29.585 63.45,28.55 C116.2@63.45,22.95 63.425,22.925 63.425,20.025 R123.1@63.4,20
GND_PFC: C100.2 C101.2 C108.1 C109.1 C110.1 C111.1 C112.1 C115.1 C118.2 C119.1 C120.1 C121.1 C122.1 D107.2 HS101.H1 HS101.H2 Q100.3 Q101.2 Q102.2 Q103.3 R100.2 R101.2 R102.2 R108.1 R113.1 R119.1 R120.1 R126.1 R129.1 T100.6 U100.3 U101.1 U101.3 | length 31.3
  Bottom Layer w0.381: R119.1@97.5,112.5 97.575,112.425 99.05,112.425 99.225,112.25 101.5,112.25 102.5,111.25 C111.1@102.5,110.35 ; D107.2@98.316,102.8 103.05,102.8 103.6,103.35 C112.1@103.6,104.1 R120.1@105,104.1
  Bottom Layer w1.524: C119.1@52.95,14.6 52.95,14.641 53.4,15.091 R126.1@53.4,19.5 ; R126.1@53.4,20 53.425,20.025 53.425,22.925 C118.2@53.45,22.95 53.5,23 53.5,30.293 T100.6@54.787,31.58
  other v1: 55.85,54.875 57.1,54.875 55.85,55.625 57.1,55.625 55.85,56.375 57.1,56.375 55.85,57.125 57.1,57.125 102.25,102.7 103.25,102.7 102.75,111.75 97.5,113.5 99.25,113.5 101,113.5 102.75,113.5
HV_PFC: D103.1 D104.1 U100.10 | length 122.4
  Top Layer w0.508: v1(19.75,39) v1(33.75,39) 39,39 44.2,44.2 44.2,54.825 57.375,68 61,68 72.5,79.5 72.5,85.25 92.35,105.1 v1(97.8,105.1)
  Bottom Layer w0.381: v1(97.8,105.1) U100.10@99.125,105.1
  Bottom Layer w1.27: D104.1@19.75,35.98 v1(19.75,39) ; D103.1@33.75,35.98 v1(33.75,39)
LINE: C103.2 D104.2 L102.1 MP100.1 RV100.1 | length 38.6
  Bottom Layer w1.524: L102.1@14.25,31.7 D104.2@19.25,31.7
  Bottom Layer w2.54: L102.1@14.25,31.7 14.25,27.95 C103.2@19.25,22.95 23,19.2 RV100.1@23,15.55 18.75,11.3 MP100.1@18.75,8.54 MP100.1@18.75,3.46
NetBR100_1: BR100.1 C105.2 L100.1 | length 56.7
  Top Layer w2.794: BR100.1@13,60.244 36.494,60.244 39.081,62.831 39.081,72.919 36.516,75.484 C105.2@34.25,75.484 29.516,75.484 26.75,78.25 L100.1@26.75,83.184
NetBR100_2: BR100.2 C102.2 C104.2 L102.4 | length 26.3
  Bottom Layer w2.54: BR100.2@13,65.324 13.043,65.367 C102.2@18,65.367 19.25,64.117 C104.2@19.25,55.45 19.25,51.7 L102.4@14.25,46.7
NetBR100_3: BR100.3 C104.1 C107.1 L102.3 | length 47.1
  Bottom Layer w2.54: BR100.3@13,70.404 32.596,70.404 35.5,67.5 C107.1@35.5,65.367 35.5,56.7 C104.1@34.25,55.45 34.25,51.7 L102.3@39.25,46.7
NetBR100_4: BR100.4 C105.1 C106.1 HS100.H1 HS100.H2 R100.1 R101.1 R102.1 R107.2
NetC106_2: C106.2 D100.2 L100.2 L101.1
NetC108_2: C108.2 R107.1 U100.4
NetC111_2: C111.2 R115.2 R118.2 U100.7
NetC112_2: C112.2 C113.2 C114.2 U100.8
NetC113_1: C113.1 C114.1 R120.2
NetC115_2: C115.2 R118.1 R119.2 U100.6 | length 5.4
  Bottom Layer w0.381: R119.2@97.5,110.6 97.525,110.625 99.1,110.625 C115.2@99.125,110.65 ; U100.6@99.125,109.1 C115.2@99.125,110.65 ; R118.1@101.25,110.55 101.2,110.6 99.175,110.6 C115.2@99.125,110.65
NetC117_1: C117.1 R121.1 R122.1 R124.2
NetC118_1: C118.1 D109.1 D111.2 R125.1 R126.2 R128.2 | length 49.5
  Top Layer w0.508: C118.1@49.95,22.95 48.25,24.65 48.25,53.2 59.05,64 v1(61.3,64) v1(62.3,64)
NetC120_2: C120.2 R127.1 U101.2 | length 4.1
  Bottom Layer w0.381: R127.1@58.6,58.05 59.9,58.05 60.4,57.55 60.6,57.55 U101.2@60.6,55.625
NetC121_2: C121.2 R130.2 U101.5 | length 3.1
  Bottom Layer w0.381: U101.5@63.6,55.625 63.6,55.376 63.626,55.35 65,55.35 65.05,55.4 65.05,56.65 C121.2@65.1,56.7
NetC122_2: C122.2 R130.1 | length 1.4
  Bottom Layer w0.381: R130.1@66.9,55.35 67.95,55.35 68.15,55.15 C122.2@68.2,55.15
NetD100_1: D100.1 D101.1 RT100.1
NetD102_1: D102.1 R104.2
NetD102_3: D102.3 R105.2 | length 3
  Bottom Layer w0.762: D102.3@44.75,3.46 R105.2@47.75,3.46
NetD105_2: D105.2 R103.1 | length 2.4
  Bottom Layer w0.762: D105.2@70.5,88.592 R103.1@72.9,88.592
NetD106_2: D106.2 R111.1
NetD108_2: D108.2 T100.7 | length 5.2
  Bottom Layer w1.524: D108.2@56.7,27.39 56.7,27.775 56.718,27.793 57.103,27.793 58.605,29.295 T100.7@58.605,31.58
NetD109_2: D109.2 T100.5
NetD110_1: D110.1 R124.1
NetD111_1: D111.1 R127.2 | length 2.3
  Bottom Layer w0.381: D111.1@58.584,61.8 58.6,61.784 R127.2@58.6,59.55
NetJP100_1: JP100.1 R103.2 R106.2
NetJP100_2: JP100.2 Q100.1 R108.2 | length 5.2
  Bottom Layer w0.762: JP100.2@84.25,84.96 86.5,84.96 Q100.1@86.5,87.96
NetJP101_1: JP101.1 R111.2 R112.2
NetJP101_2: JP101.2 Q103.1 R113.2 | length 5.3
  Bottom Layer w0.762: JP101.2@84.25,64.96 86.5,64.96 Q103.1@86.5,67.96
NetQ101_1: Q101.1 R109.1
NetQ101_3: Q101.3 R104.1 | length 2.1
  Bottom Layer w0.508: R104.1@51.15,8.54 Q101.3@53.218,8.54
NetQ102_1: Q102.1 R110.1
NetQ102_3: Q102.3 R105.1 R109.2
NetR115_1: R115.1 R116.2 | length 3.8
  Bottom Layer w0.762: R115.1@107.25,105.7 R116.2@111,105.7
NetR116_1: R116.1 R117.2 | length 1.9
  Bottom Layer w0.762: R117.2@111,100.45 R116.1@111,102.3
NetR128_1: R128.1 R129.2 U101.4 | length 3.4
  Bottom Layer w0.381: U101.4@62.6,55.625 62.574,55.651 62.574,57.376 62.4,57.55 R129.2@63.8,57.55
NEUTRAL: C103.1 D103.2 L102.2 MP102.1 RV100.2 | length 38.6
  Bottom Layer w1.524: D103.2@34.25,31.7 L102.2@39.25,31.7
  Bottom Layer w2.54: MP102.1@34.75,3.46 MP102.1@34.75,8.54 34.75,9.4 RV100.2@30.5,13.65 34.25,17.4 C103.1@34.25,22.95 34.25,26.7 L102.2@39.25,31.7
PG_OUT_PFC: R110.2 R114.1 U100.5 | length 150.8
  Top Layer w0.508: v1(58.5,4.41) 52.99,4.41 46.75,10.65 46.75,53.5 58.55,65.3 61.8,65.3 75,78.5 75,84.25 91.95,101.2 97.1,101.2 99.3,103.4 99.3,107.95 96.75,110.5 v1(92.25,110.5)
  Bottom Layer w0.381: v1(92.25,110.5) 93.775,110.5 R114.1@93.875,110.6 U100.5@93.875,109.1
  Bottom Layer w0.508: R110.2@57.3,4.41 v1(58.5,4.41)
pads on no net: MH100.H MH101.H MH102.H MH103.H T100.1 T100.3 U100.9

## Polygon pours and split planes (outlines as drawn)
PG_OUT_PFC on Bottom Layer "PG_OUT_PFC_L02_P161" (solid, pour order 161): 56.7,4.8 56.7,4 56.8,3.9 58.8,3.9 58.9,4 58.9,4.8 58.8,4.9 56.8,4.9
NetQ101_1 on Bottom Layer "NETQ101_1_L02_P160" (solid, pour order 160): 54.3,9.8 54.3,9.3 54.4,9.2 56.6,9.2 56.8,9 57.8,9 57.9,9.1 57.9,10 57.8,10.1 56.8,10.1 56.6,9.9 54.4,9.9
NetQ102_1 on Bottom Layer "NETQ102_1_L02_P159" (solid, pour order 159): 53,2.8 56.6,2.8 56.8,3 57.8,3 58,2.8 58,2.2 57.8,2 56.8,2 56.6,2.2 53,2.2 52.9,2.3 52.9,2.7
NetQ102_3 on Bottom Layer "NETQ102_3_L02_P158" (solid, pour order 158): 50.3,4.1 50.3,2.8 50.6,2.5 51.7,2.5 52.4,3.2 55.9,3.2 56.1,3.4 56.1,4 56.1,5.3 56.3,5.5 57.5,5.5 58,6 58,7.9 57.7,8.2 56.9,8.2 56.6,7.9 56.6,6.8 56.3,6.5 55.2,6.5 55,6.3 55,4.1 54.6,3.7 52.5,3.7 51.8,4.4 50.6,4.4
NetQ101_3 on Bottom Layer "NETQ101_3_L02_P157" (solid, pour order 157): 50.5,9.4 50.5,7.7 51,7.2 52.4,7.2 53.4,8.2 53.7,8.2 53.9,8.4 53.9,8.9 53.7,9.1 52.6,9.1 52,9.7 50.8,9.7
NetD102_3 on Bottom Layer "NETD102_3_L02_P156" (solid, pour order 156): 44,2.42 48.3,2.42 48.6,2.72 48.6,4.22 48.3,4.52 44,4.52 43.6,4.12 43.6,2.82
NetD102_1 on Bottom Layer "NETD102_1_L02_P155" (solid, pour order 155): 44,7.5 48.3,7.5 48.6,7.8 48.6,9.3 48.3,9.6 44,9.6 43.6,9.2 43.6,7.9
GND_PFC on Bottom Layer "GND_PFC_L02_P154" (solid, pour order 154): 53.25,14.35 52.6,13.7 49.9,11 49.9,7.6 50.9,6.6 52.8,6.6 53,6.8 53.7,6.8 53.7,4.9 53,4.9 52.2,5.7 50.6,5.7 49.1,7.2 49.1,11.5 52.6,15
GND_PFC on Bottom Layer "GND_PFC_L02_P153" (solid, pour order 153): 53.4,31.4 54.4,32.4 55.1,32.4 55.7,31.8 55.7,31.3 54.3,29.9 54.3,14.7 53.3,13.7 52.6,13.7 52,14.3 52,15 52.6,15.6 52.6,30.6
GND_ISO on Bottom Layer "GND_ISO_L02_P152" (solid, pour order 152): 61.5,29.3 62.6,28.2 62.6,16.1 62,15.5 60,15.5 59.6,15.1 59.6,14 60,13.6 62.9,13.6 64.3,15 64.3,28.9 63.3,29.9 63.3,32 62.8,32.5 62,32.5 61.5,32
+5V_ISO on Bottom Layer "+5V_ISO_L02_P151" (solid, pour order 151): 55.6,24.2 55.6,22.1 56,21.7 58.3,21.7 59,21 59,18.7 59.4,18.3 60.6,18.3 61,18.7 61,23.4 59.8,24.6 56,24.6
NetD108_2 on Bottom Layer "NETD108_2_L02_P150" (solid, pour order 150): 57.7,32.2 57.7,29.7 56.8,28.8 55.9,28.8 55.6,28.5 55.6,26.3 55.9,26 57.6,26 59.5,27.9 59.5,32.2 59.2,32.5 58,32.5
NetD109_2 on Bottom Layer "NETD109_2_L02_P149" (solid, pour order 149): 47.8,32.5 51.4,32.5 51.9,32 51.9,31 51.4,30.5 48.7,30.5 47.6,29.4 47.6,26.1 47.2,25.7 46.1,25.7 45.7,26.1 45.7,30.4
GND_PFC on Bottom Layer "GND_PFC_L02_P146" (solid, pour order 146): 63.254,61.293 63.254,64.046 62.5,64.8 60.8,64.8 60.35,64.35 60.35,62.85 61,62.2 61,60.5 59.8,60.5 59.8,61.5 59.8,63.05 59.254,63.596 57.696,63.596 57.1,63 57.1,58.7 57.6,58.2 57.6,57.4 55.4,57.4 55.4,63.55 57.85,66 62.6,66 65.004,63.596 65.004,61.2
DRAIN_PFC on Bottom Layer "DRAIN_PFC_L02_P106" (solid, pour order 106): 78.5,55.75 83,51.25 86.8,51.25 87.5,51.95 87.5,62.4 87.1,62.8 83.5,62.8 82.6,63.7 82.6,68.75 78.5,68.75
PG_OUT_PFC on Bottom Layer "PG_OUT_PFC_L02_P144" (solid, pour order 144): 91.9,109.9 93,108.8 94.7,108.8 94.7,109.5 94.5,109.7 94.4,109.8 94.4,111.2 94.2,111.4 92.3,111.4 91.9,111
NetC115_2 on Bottom Layer "NETC115_2_L02_P143" (solid, pour order 143): 97.002,111.084 97,111.082 97,110 97.1,109.9 98,109.9 98.3,109.6 98.3,108.8 100,108.8 100,109.5 100.5,110 101.7,110 101.8,110.1 101.8,111 101.6,111.2 97.1,111.2 97,111.1
GND_PFC on Bottom Layer "GND_PFC_L02_P142" (solid, pour order 142): 63.254,59.246 63.5,59 64.947,59 66.4,57.547 66.4,56.5 66.6,56.3 68.757,56.3 68.9,56.443 68.9,57.747 65.854,60.793 65.004,61.643 63.604,61.643 63.254,61.293 63.254,60.093
GND_PFC on Bottom Layer "GND_PFC_L02_P140" (solid, pour order 140): 90,103.4 90,101.4 94.5,96.9 94.5,94 99.2,94 99.2,100.1 100.4,101.3 101.4,101.3 101.4,102.9 101.2,103.1 99.9,103.1 99.1,103.9 97.7,103.9 97.5,103.7 97.5,101.8 97.5,101 96.5,100 92.9,100 90.9,102 90.9,103.4
GND_PFC on Bottom Layer "GND_PFC_L02_P139" (solid, pour order 139): 94.7,106.8 91.4,106.8 90.9,106.3 90.9,103 90.6,102.7 90.3,102.7 90,103 90,106.7 90,107.4 90.2,107.6 91.2,107.6 91.4,107.4 94.7,107.4
GND_PFC on Bottom Layer "GND_PFC_L02_P138" (solid, pour order 138): 97.5,103.7 97.5,101.8 98,101.3 104.2,101.3 105.7,102.8 105.7,104.6 105.5,104.8 104.5,104.8 104.3,104.6 103.2,104.6 103,104.4 103,103.6 102.5,103.1 99.9,103.1 99.1,103.9 97.7,103.9
NetC118_1 on Bottom Layer "NETC118_1_L02_P135" (solid, pour order 135): 61.8,59.2 62,59 62.8,59 63,59.2 63,63.85 62.35,64.5 61.1,64.5 60.7,64.1 60.7,63 60.9,62.8 61.3,62.8 61.5,62.6 61.5,60.9 61.8,60.6
GND_PFC on Bottom Layer "GND_PFC_L02_P128" (solid, pour order 128): 56.1,54 61.6,54 61.9,54.3 61.9,56.5 61.3,56.5 61.3,54.7 61.1,54.5 60.1,54.5 59.9,54.7 59.9,56.5 59.6,56.8 58.2,56.8 57.6,57.4 57.6,58.2 57.3,58.5 55.7,58.5 55.4,58.2 55.4,54.7 55.4,58.2 55.4,54.7
GND_PFC on Bottom Layer "GND_PFC_L02_P124" (solid, pour order 124): 59.8,59.1 59.9,59 61.3,59 61.4,59.1 61.4,60.3 61,60.7 61,61.5 60.8,61.7 60,61.7 59.8,61.5 59.8,60.2
NetD111_1 on Bottom Layer "NETD111_1_L02_P123" (solid, pour order 123): 59.2,59.2 59.4,59.4 59.4,63.1 59.2,63.3 58,63.3 57.7,63 57.7,59.4 57.9,59.2
NetR128_1 on Bottom Layer "NETR128_1_L02_P121" (solid, pour order 121): 61.8,58.3 61.8,57.2 62.3,56.7 62.3,54.8 62.9,54.8 62.9,56.8 63.3,57.2 64.2,57.2 64.5,57.5 64.5,58.2 64.2,58.5 62,58.5
NetC120_2 on Bottom Layer "NETC120_2_L02_P120" (solid, pour order 120): 58,58.3 58,57.5 58.2,57.3 59.8,57.3 60.3,56.8 60.3,54.8 60.9,54.8 60.9,56.7 61.4,57.2 61.4,58.3 61.2,58.5 58.2,58.5
NetC108_2 on Bottom Layer "NETC108_2_L02_P119" (solid, pour order 119): 88,110.1 88,108.3 88.3,108 91.5,108 91.7,107.8 94.7,107.8 94.7,108.4 92.4,108.4 91.2,109.6 90.2,109.6 89.5,110.3 88.2,110.3
NetC113_1 on Bottom Layer "NETC113_1_L02_P118" (solid, pour order 118): 103.1,107.6 103.1,105.2 103.3,105 104.2,105 104.6,105.4 105.6,105.4 105.7,105.5 105.7,106.5 105.5,106.7 104.6,106.7 104.1,107.2 104.1,107.6 103.9,107.8 103.3,107.8
NetC112_2 on Bottom Layer "NETC112_2_L02_P117" (solid, pour order 117): 98.3,106.8 101.1,106.8 101.4,106.5 101.4,103.6 101.6,103.4 102.2,103.4 102.4,103.6 102.4,107.5 102.3,107.6 101.4,107.6 101.1,107.3 98.3,107.3
NetC111_2 on Bottom Layer "NETC111_2_L02_P116" (solid, pour order 116): 98.3,108.4 100.1,108.4 100.9,109.2 103.7,109.2 105,109.2 105.6,109.8 108.2,109.8 108.5,109.5 108.5,108.5 108.2,108.2 101.3,108.2 100.9,107.8 98.3,107.8
NetC122_2 on Bottom Layer "NETC122_2_L02_P114" (solid, pour order 114): 66.4,55.8 66.4,54.7 66.6,54.5 68.7,54.5 68.9,54.7 68.9,55.8 68.7,56 66.6,56
NetC121_2 on Bottom Layer "NETC121_2_L02_P113" (solid, pour order 113): 63.35,54.75 63.6,54.5 65.35,54.5 65.8,54.95 65.8,57.1 65.6,57.3 64.8,57.3 64.25,56.75 63.6,56.75 63.35,56.5
NetC106_2 on Bottom Layer "NETC106_2_L02_P112" (solid, pour order 112): 25,90.571 25.834,89.736 25.848,89.75 27.5,89.75 28.25,90.5 28.25,97 31.5,100.25 39.75,100.25 42.75,97.25 42.75,79.75 43.75,78.75 55.25,78.75 56,79.5 56,81.2 55.2,82 47,82 45.9,83.1 45.9,98.9 41.3,103.5 30.25,103.5 25,98.25
NetD110_1 on Bottom Layer "NETD110_1_L02_P111" (solid, pour order 111): 51.75,49.75 52,49.5 54.25,49.5 54.5,49.75 54.5,52 54.25,52.25 54.25,53.75 54,54 52.25,54 52,53.75 52,52.25 51.75,52
NetC117_1 on Bottom Layer "NETC117_1_L02_P110" (solid, pour order 110): 45.5,59.75 45.5,58.1 44.6,57.2 44.6,55.8 45.15,55.25 51.25,55.25 51.75,55.75 54,55.75 54.25,56 54.25,57.25 54,57.5 47.75,57.5 46.75,58.5 46.75,59.75 46.5,60 45.75,60
+400V_PFC on Bottom Layer "+400V_PFC_L02_P108" (solid, pour order 108): 75.032,44.508 52.992,44.508 52,45.5 52,47.5 50.5,49 50.5,51.75 49.5,52.75 45,52.75 43.5,54.25 43.5,59.75 43.25,60 42.5,60 42.25,59.75 42.25,51.75 51.5,42.5 75.032,42.5
GD_PFC on Bottom Layer "GD_PFC_L02_P097" (solid, pour order 97): 66.5,86 73.2,86 73.6,85.6 73.6,84.2 73.2,83.8 66.9,83.8 65.6,82.5 65.6,70.4 70,66 73.1,66 73.5,65.6 73.5,64.2 73.1,63.8 69.95,63.8 64,69.75 64,83.5
+15V on Bottom Layer "+15V_L02_P105" (solid, pour order 105): 45.5,6.75 45.75,6.5 45.75,5.5 45.5,5.25 42.5,5.25 41,6.75 41,15.5 43.25,17.75 47.25,17.75 47.75,17.25 47.75,16.25 47.25,15.75 44.25,15.75 43,14.5 43,7.5 43.75,6.75
NetC118_1 on Bottom Layer "NETC118_1_L02_P104" (solid, pour order 104): 45.25,24 45.25,22.25 45.75,21.75 48.25,21.75 48.75,21.25 48.75,15.75 49.25,15.25 50.5,15.25 51,15.75 51,23.5 50,24.5 45.75,24.5
GND_PFC on Bottom Layer "GND_PFC_L02_P102" (solid, pour order 102): 52.8,4.3 53,4.1 54.1,4.1 54.3,4.3 54.3,6.8 54.6,7.1 55.6,7.1 55.8,7.3 55.8,7.8 55.6,8 54.2,8 52.8,6.6
GND_PFC on Bottom Layer "GND_PFC_L02_P101" (solid, pour order 101): 96.75,113.75 96.75,112 97,111.75 101.5,111.75 102,111.25 102,110 102.25,109.75 103.25,109.75 103.5,110 103.5,113.5 103,114 97,114
NetD100_1 on Bottom Layer "NETD100_1_L02_P098" (solid, pour order 98): 96.25,49.25 97,50 97,50.75 97.5,51.25 99.25,51.25 99.75,50.75 99.75,48 98.25,46.5 83.3,46.5 57.605,72.195 57.605,81.505 58.1,82 59.75,82 60.25,81.5 60.25,72.25 83.25,49.25
+15V on Bottom Layer "+15V_L02_P096" (solid, pour order 96): 91.7,105 91.7,102.1 92.7,101.1 95.6,101.1 96.3,101.8 96.3,110 96.3,111 96,111.3 95.3,111.3 95,111 95,105.7 94.7,105.4 92.1,105.4
NetBR100_4 on Bottom Layer "NETBR100_4_L02_P001" (solid, pour order 1): 11.5,76.5 11.5,74.5 12,74 20,74 21,75 21,99 16.5,103.5 16.5,105.75 18.5,107.75 85.5,107.75 86.2,108.45 86.2,114.05 85.5,114.75 11.75,114.75 1.5,104.5 1.5,96.25 4.5,96.25 10,101.75 13.25,101.75 17.5,97.5 17.5,78 16.5,77 12,77
+400V_PFC on Bottom Layer "+400V_PFC_L02_P046" (solid, pour order 46): 72.5,44.5 74.5,42.5 105.75,42.5 112.5,49.25 112.5,97.25 111.75,98 105.75,98 105.75,88.75 109.25,88.75 109.25,94.5 109.5,94.75 109.75,94.75 110,94.5 110,49.5 105,44.5
GND_PFC on Bottom Layer "GND_PFC_L02_P091" (solid, pour order 91): 94.5,96.75 95.5,97.75 98.25,97.75 99.2,96.8 99.2,64.2 98,63 89.5,63 88.4,64.1 88.4,91.25 93.75,91.25 93.75,67.75 94,67.5 94.25,67.5 94.5,67.75
GND_PFC on Bottom Layer "GND_PFC_L02_P089" (solid, pour order 89): 78,92.25 71,99.25 71,103.25 71.75,104 83.75,104 84.5,103.25 84.5,101.75 86,100.25 90.25,100.25 93.75,96.75 93.75,88.5 88.5,88.5 88.4,88.6 88.4,91.35 87.5,92.25
NetD105_2 on Bottom Layer "NETD105_2_L02_P062" (solid, pour order 62): 69.4,88.1 69.7,87.8 73.4,87.8 73.7,88.1 73.7,89.3 73.4,89.6 69.7,89.6 69.4,89.3
NetD106_2 on Bottom Layer "NETD106_2_L02_P061" (solid, pour order 61): 69.4,68.1 69.7,67.8 73.4,67.8 73.7,68.1 73.7,69.3 73.4,69.6 69.7,69.6 69.4,69.3
NetJP100_1 on Bottom Layer "NETJP100_1_L02_P060" (solid, pour order 60): 74.5,84.2 74.9,83.8 77.6,83.8 78,84.2 78,85.9 77.6,86.3 76.1,86.3 75.8,86.6 75.8,89.4 75.6,89.6 74.7,89.6 74.5,89.4